# Altium PCB PCB3.PcbDoc (part 1 of 2)
Units mil, origin at the board's own origin, x right, y up, seen from the top; angles counter-clockwise.
Board outline 4805.03 x 4420.03 mil, 2 copper layers (Top Layer, Bottom Layer); 108 components, 108 nets, 556 pads, 252 vias.
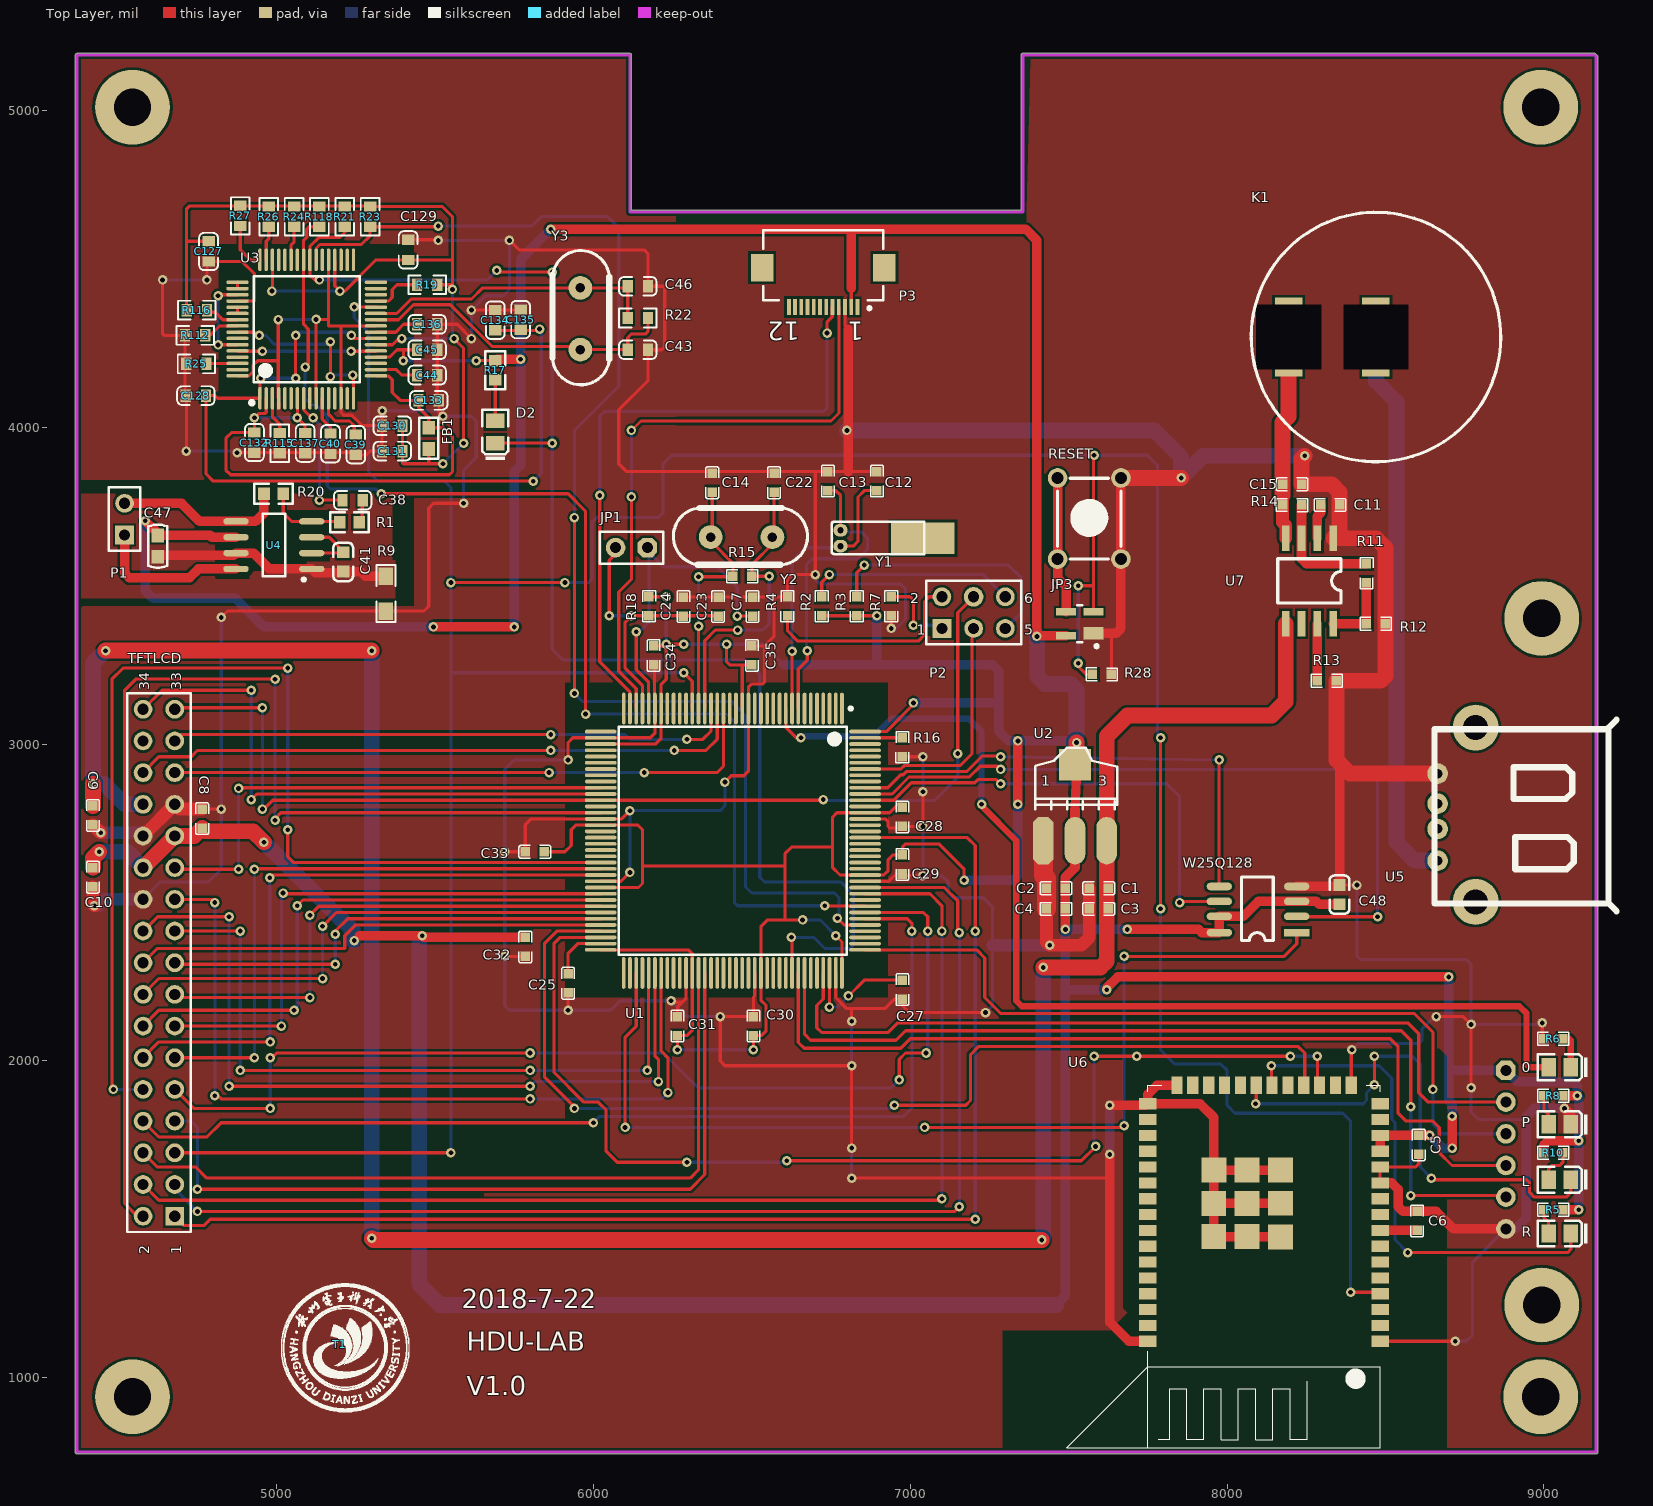
[diagram p0: Top Layer view]
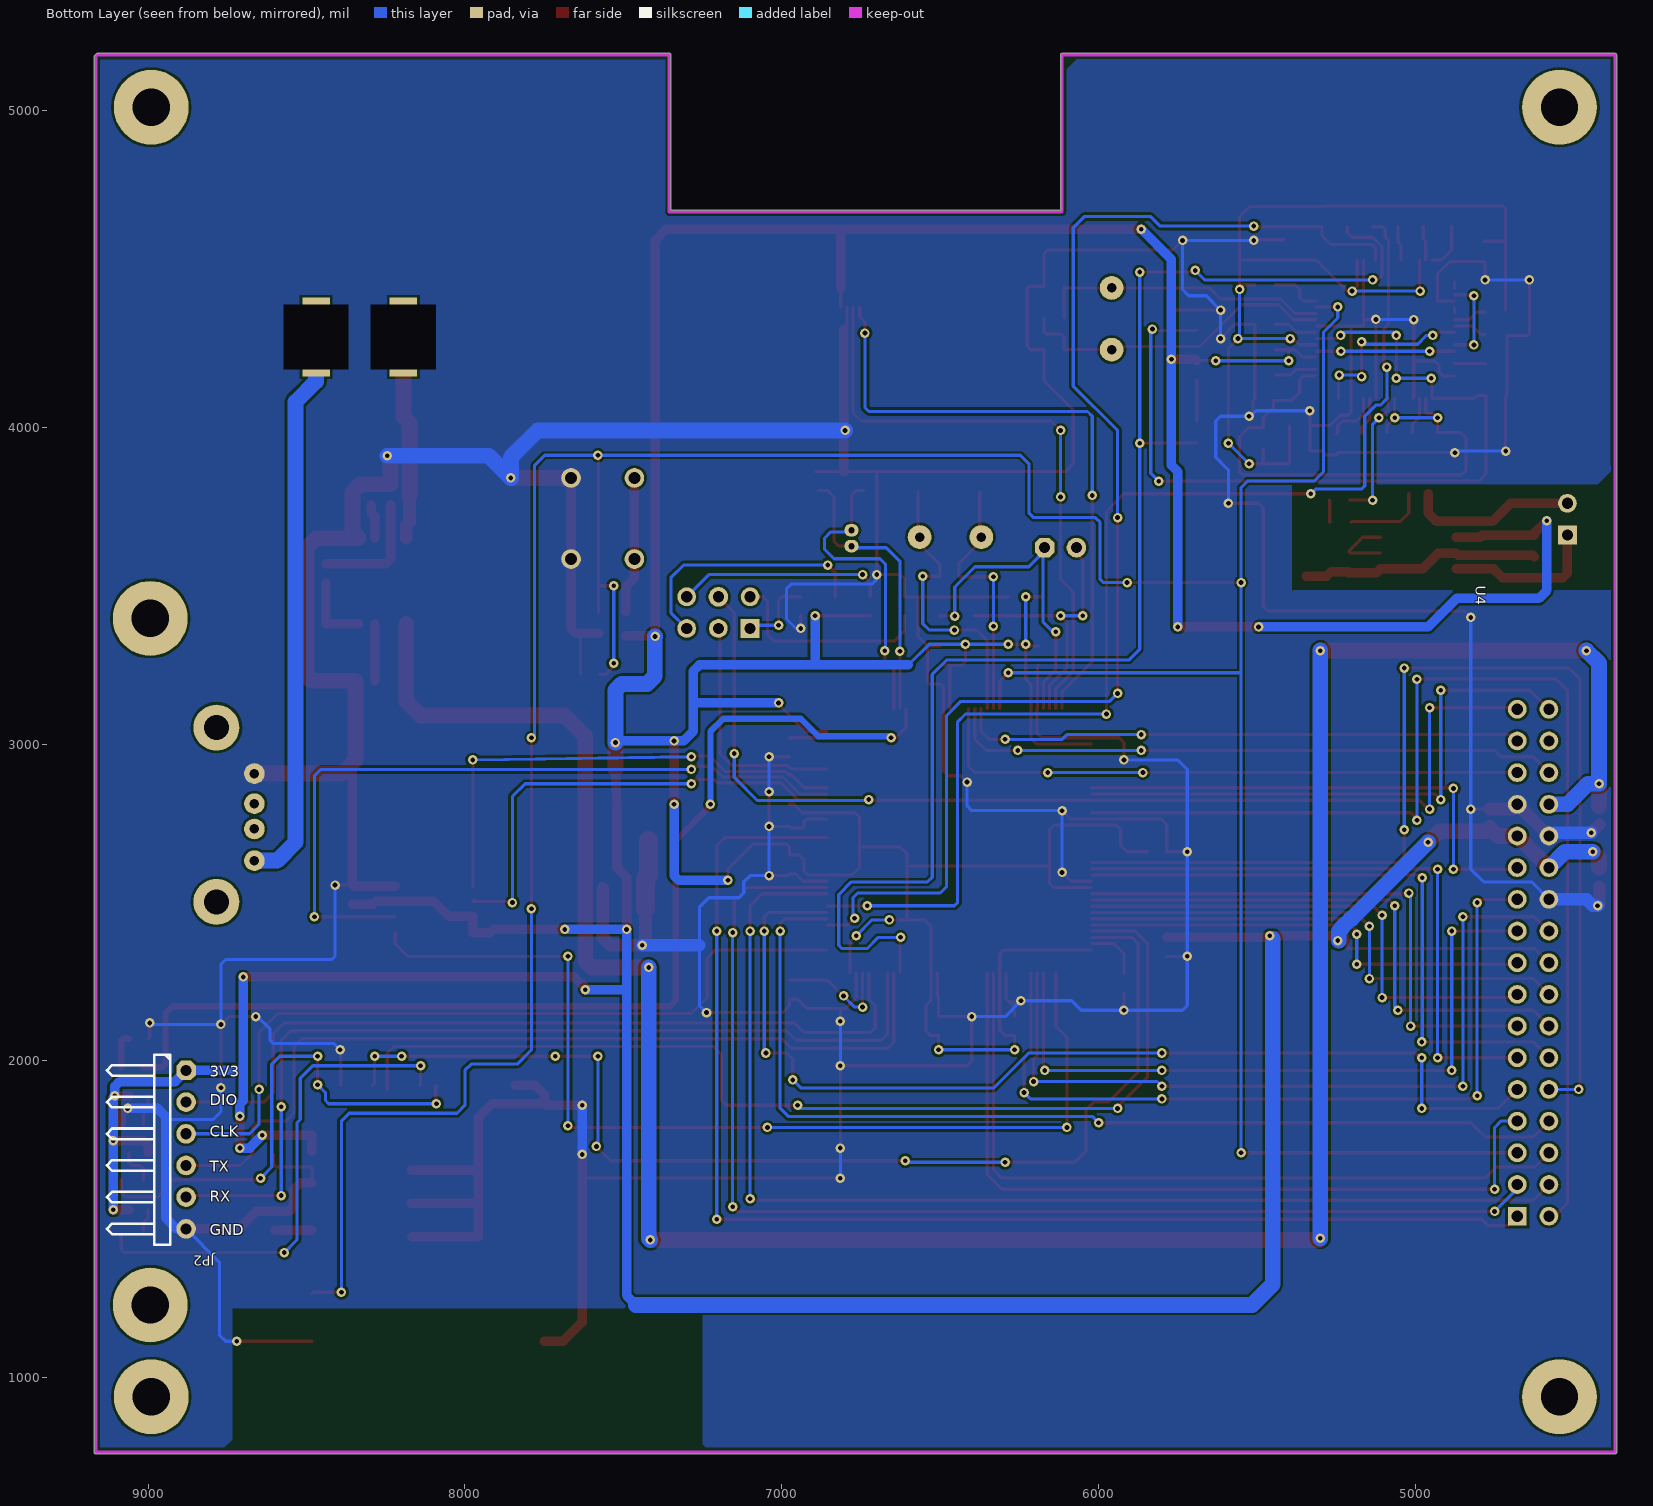
[diagram p1: Bottom Layer view, seen from below]
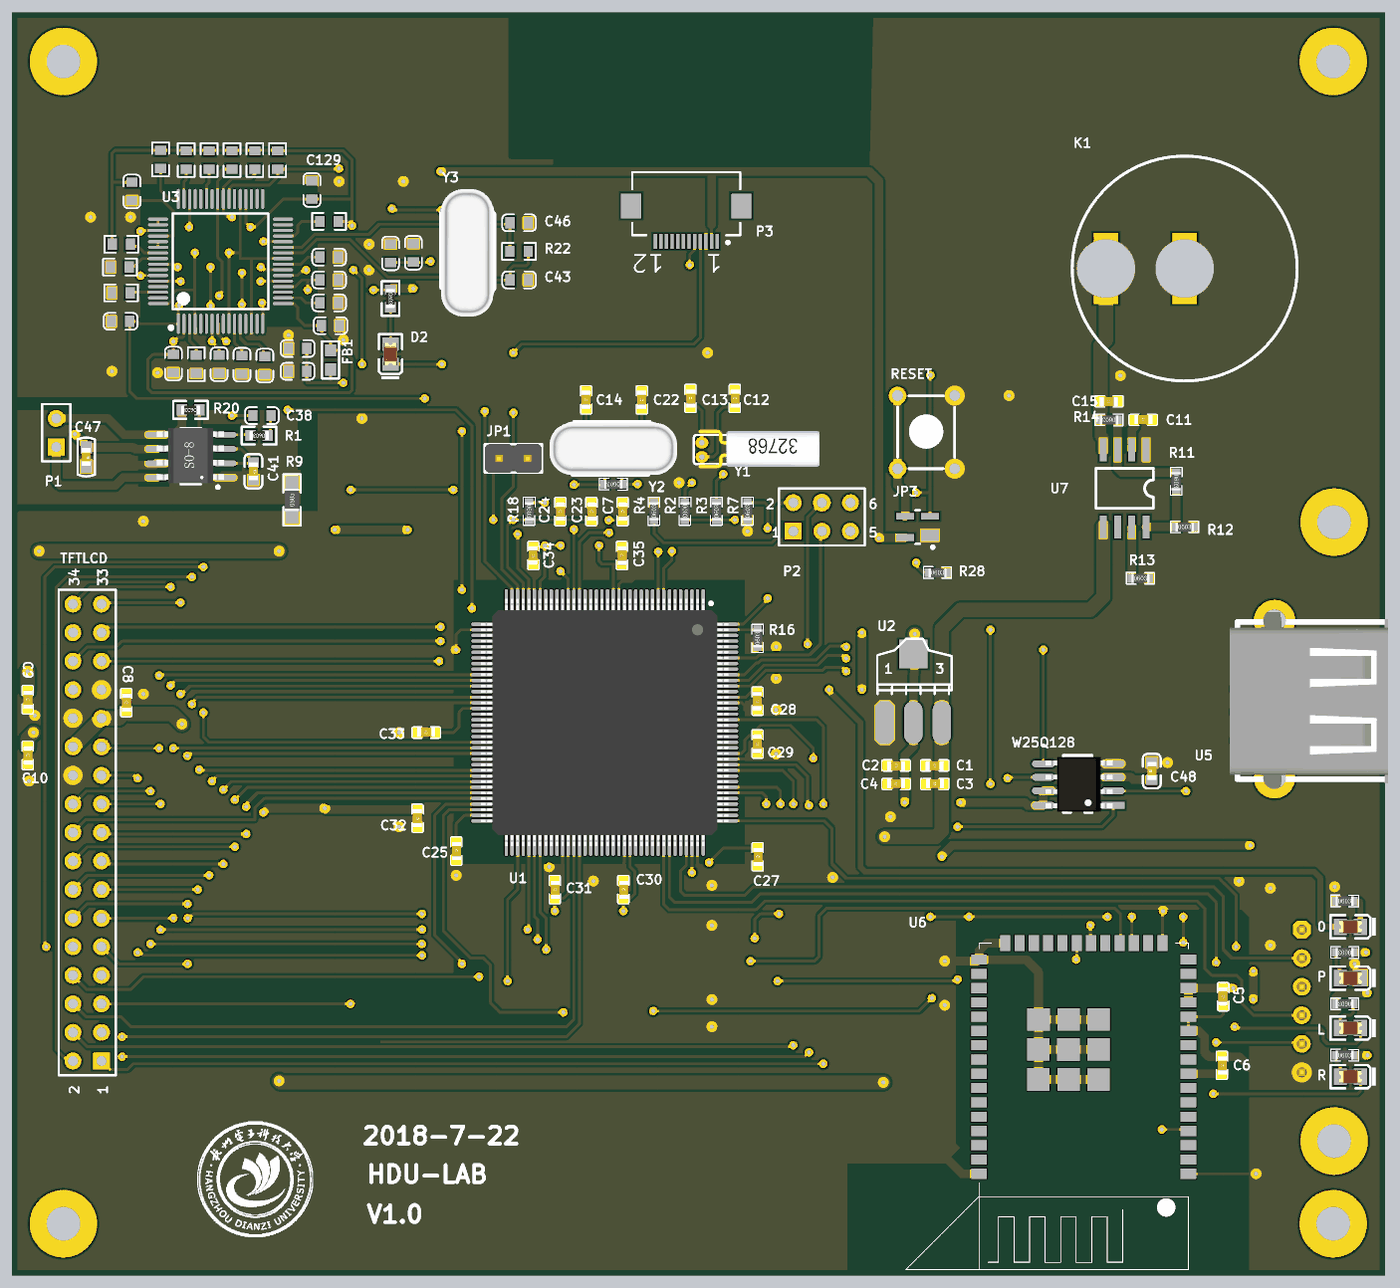
[diagram p3: 3D render of the assembled board from above, using the file's embedded part models]

## Layer stack, top to bottom
Top Solder: solder mask 0.4, Solder Resist, Dk 3.5
Top Layer: signal copper 1.4
Dielectric 1: dielectric 12.6, FR-4, Dk 4.8
Bottom Layer: signal copper 1.4
Bottom Solder: solder mask 0.4, Solder Resist, Dk 3.5

## Board outline
4364.99,765 ccw(c4370,765) 4370,759.99 9165,759.99 ccw(c9165,765) 9170.01,765 9170.01,5170 ccw(c9165,5170) 9168.53,5173.56 9168.54,5173.55 9163.55,5178.55 9163.56,5178.53 ccw(c9160,5175) 9160,5180.02 7355,5180.02 ccw(c7355,5175) 7349.98,5175 7349.98,4685.02 6120.02,4685.02 6120.02,5175 ccw(c6115,5175) 6115,5180.02 4370,5180.02 ccw(c4370,5175) 4364.98,5175

## Design rules (kind name [scope] priority, off if disabled: settings)
Clearance [All] p1: gap=8 ignorepadtopadclearanceinfootprint=TRUE
PlaneConnect [All] p1: planeconnectstyle=Direct reliefexpansion=20 reliefentries=4 reliefconductorwidth=10 reliefairgap=10
PolygonConnect [All] p1: connectstyle=Direct reliefconductorwidth=10 reliefentries=4 polygonreliefangle="90 Angle" airgapwidth=10
RoutingVias [All] p1: holewidth=15 width=30 viastyle="Through Hole" minholewidth=15 minwidth=30 maxholewidth=15 maxwidth=30
SolderMaskExpansion [All] p1: expansion=4
Width Width_7 [InNet('GND')] p1: maxlimit=120 minlimit=10 preferedwidth=60
Width Width_6 [InNet('BAT')] p2: maxlimit=50 minlimit=10 preferedwidth=30
Width Width_5 [InNet('24V_IN')] p3: maxlimit=120 minlimit=50 preferedwidth=100
Width Width_4 [InNet('5V_IN')] p4: maxlimit=80 minlimit=10 preferedwidth=60
Width Width_3 [InNet('3V3')] p5: maxlimit=60 minlimit=10 preferedwidth=40
Width Width_2 [InNet('+5V')] p6: maxlimit=80 minlimit=10 preferedwidth=60
Width Width_1 [InNet('+24V')] p7: maxlimit=120 minlimit=50 preferedwidth=100
Width [All] p8: maxlimit=100 minlimit=10 preferedwidth=10
29 further rules are at their usual default settings.

## Classes and differential pairs
component class 实验平台2: 0 C1 C2 C3 C4 C5 C6 C7 C8 C9 C10 C11 C12 C13 C14 C15 C22 C23 C24 C25 C27 C28 C29 C30 C31 C32 C33 C34 C35 C38 C41 C43 C46 C47 C48 C129 D2 FB1 JP1 JP2 JP3 K1 L P P1 P2 P3 R R1 R2 R3 R4 R7 R9 R11 R12 R13 R14 R15 R16 R18 R20 R22 R28 RESET TFTLCD U1 U2 U3 U4 U5 U6 U7 W25Q128 Y1 Y2 Y3 ""

## Components (designator, comment, footprint, x,y, rotation, side; value= is the part's Value field where it differs from the comment)
0 "白灯 0805" 0805_LED_S1 9050,1980 r180 top (schematic designator D4)
C1 "10uF" 0603_C#1 7595,2545 r180 top
C2 "10uF" 0603_C#1 7460,2545 r180 top
C3 "104" 0603_C#1 7595,2480 r0 top
C4 "104" 0603_C#1 7460,2480 r0 top
C5 "104" 0603_C#1 8605,1735 r90 top
C6 "100nF" 0603_C#1 8600,1495 r270 top value=104
C7 "2.2u" 0603_C#1 6502.43,3434 r270 top value=104
C8 "104" 0603_C#1 4765,2765 r270 top
C9 "104" 0603_C#1 4420,2775 r270 top
C10 "104" 0603_C#1 4420,2580 r270 top
C11 "1nF" 0603_C#1 8325,3755 r0 top value=104
C12 "22p" 0603_C#1 6895,3830 r270 top
C13 "22p" 0603_C#1 6740,3830 r270 top
C14 "22p" 0603_C#1 6375,3825 r90 top
C15 "100nF" 0603_C#1 8205,3820 r180 top value=104
C22 "22p" 0603_C#1 6570,3825 r90 top
C23 "10u" 0603_C#1 6393.28,3434 r270 top
C24 "104" 0603_C#1 6284.14,3434 r270 top
C25 "2.2uf" 0603_C#1 5920,2245 r270 top
C27 "2.2uf" 0603_C#1 6975,2225 r270 top
C28 "104" 0603_C#1 6975,2770 r90 top
C29 "104" 0603_C#1 6975,2620 r90 top
C30 "104" 0603_C#1 6505,2110 r270 top
C31 "104" 0603_C#1 6265,2110 r270 top
C32 "104" 0603_C#1 5785,2360 r90 top
C33 "104" 0603_C#1 5815,2660 r0 top
C34 "104" 0603_C#1 6190,3280 r90 top
C35 "104" 0603_C#1 6500,3280 r270 top
C38 "1uF" C0603(1608) 5240,3770 r180 top
C39 "10uF" C0603(1608) 5250,3945 r270 top
C40 "10uF" C0603(1608) 5170,3948 r270 top
C41 "1uF (105) 10% 50V" 0603_C#2 5210,3575 r270 top
C43 "27pF" C0603(1608) 6140.06,4245 r180 top
C44 "0.1uF" C0603(1608) 5475,4165 r0 top
C45 "0.1uF" C0603(1608) 5475,4245 r0 top
C46 "27pF" C0603(1608) 6140.06,4445 r180 top
C47 "100nF" C-0603 4625,3625 r270 top
C48 "0.1uF" 0603_C#2 8355,2525 r90 top
C127 "0.1uF" C0603(1608) 4785,4555 r90 top
C128 "0.1uF" C0603(1608) 4745,4100 r0 top
C129 "0.1uF" C0603(1608) 5415,4560 r270 top
C130 "10uF" C0603(1608) 5365,4005 r180 top
C131 "0.1uF" C0603(1608) 5365,3925 r0 top
C132 "10uF" C0603(1608) 4930,3952 r270 top
C133 "0.1uF" C0603(1608) 5480,4085 r180 top
C134 "10uF" C0603(1608) 5690,4338 r90 top
C135 "0.1uF" C0603(1608) 5770,4340 r270 top
C136 "1uF" C0603(1608) 5475,4325 r0 top
C137 "0.1uF" C0603(1608) 5090,3950 r90 top
D2 "红灯 0805" 0805_LED_S1 5690,3985 r90 top
FB1 "100M/600R" B0603 5480,3965 r270 top
JP1 "header" header2 6170,3620 r180 top
JP2 "header" header6HA 8880,1970 r270 bottom
JP3 "复位芯片" SOT-143_M 7535,3380 r180 top
K1 "开关" kaiguan 8458.66,4279.77 r180 top
L "翠绿 0805" 0805_LED_S1 9050,1625 r180 top (schematic designator D3)
P "红灯 0805" 0805_LED_S1 9050,1800 r180 top (schematic designator D5)
P1 "扬声器" HDR1X2 4520,3660 r90 top
P2 "Header 3X2" HDR2X3 7100,3365 r0 top
P3 "二维码" FH12A-12S-0.5sH 6525.31,3955 r180 top
R "蓝灯 0805" 0805_LED_S1 9050,1455 r180 top (schematic designator D1)
R1 "2KΩ (2001) ±1%" 0603_R#1 5230,3700 r180 top
R2 "10K" 0603_R#2 6720.71,3434.99 r270 top value=1K
R3 "10K" 0603_R#2 6830.86,3435 r90 top value=1K
R4 "10K" 0603_R#2 6612.57,3435 r90 top value=1K
R5 "1K" 0603_R#2 9030.01,1530 r0 top
R6 "1K" 0603_R#2 9030.01,2070 r0 top
R7 "10K" 0603_R#2 6940,3435 r90 top value=1K
R8 "1K" 0603_R#2 9030,1890 r180 top
R9 "Res2" 0805_r 5345,3475 r90 top value=0R
R10 "1K" 0603_R#2 9030,1710 r180 top
R11 "22K" 0603_R#2 8440,3540 r270 top value=1K
R12 "100K" 0603_R#2 8470,3380 r0 top value=1K
R13 "76K" 0603_R#2 8315,3200 r0 top value=1K
R14 "271K" 0603_R#2 8205,3755 r180 top value=1K
R15 "1M/0805" 0603_R#2 6470,3530 r180 top
R16 "0" 0603_R#2 6975,2990 r90 top value=1K
R17 "1KΩ (1001) ±1%" 0603_R#1 5690,4180 r270 top
R18 "10" 0603_R#2 6175,3434.99 r270 top value=1K
R19 "10K" R0603 5475,4450 r0 top
R20 "22KΩ (2202) ±1%" 0603_R#1 4990.32,3790 r180 top
R21 "10K" R0603 5215,4665 r270 top
R22 "4.7M" R0603 6140,4345 r180 top
R23 "10K" R0603 5295,4665 r270 top
R24 "10K" R0603 5055,4665 r270 top
R25 "10K" R0603 4747,4200 r0 top
R26 "10K" R0603 4975,4665 r270 top
R27 "10K" R0603 4885,4667 r270 top
R28 "100K" 0603_R#2 7605,3220 r0 top value=1K
R112 "10K" R0603 4743,4290 r0 top
R115 "10K" R0603 5010,3950 r90 top
R116 "10K" R0603 4748,4370 r180 top
R118 "10K" R0603 5135,4665 r270 top
RESET "KEY_M" KEY_M 7465,3584.09 r90 top
T1 "HDU" HDU 5200,1105 r0 top
TFTLCD "TFT_LCD" HDR2X17 4678.35,1510 r90 top
U1 "STM32F407Z" LQFP144 6440,2695 r270 top
U2 "AMS1117-3.3" AMS1117 7419.97,2695.06 r0 top
U3 "XFS5152CE" LQFP-64_10x10x05P 5095,4310 r0 top
U4 "HXJ8002" SOIC-8#1 4995,3630 r90 top
U5 "USB-AM" USB_AM 8950,2780 r0 top
U6 "USR-C322" USR-C322-PCB 8483.07,1922.87 r180 top
U7 "tps25921a过压保护" SOIC-8#2 8335,3650 r270 top
W25Q128 "W25Q128" SO-8N 8095,2480 r180 top
Y1 "32.768K" XTAL_32 6780,3625 r0 top
Y2 "8MHz" XTAL_2 6480,3655 r180 top
Y3 "12M" XTAL_2 5960,4330 r90 top

## Footprints (in the part's own frame and the unit in brackets; to place one, negate y for a bottom-side part, rotate by r counter-clockwise, add the part's x,y. Pads: shape width x height; smd on the part's side, far side on the other; paste and mask are expansions set on the pad)
0603_C#1 [mil] "Capacitor"
  rect 30x30 smd: 1(-30,0) 2(30,0)
  silkscreen extent -50,-20 50,20, body extent -51,-18 52,21, height 35
0603_C#2 [mil]
  rect 36.61x38.58 smd: 1(-30.32,0) 2(30.32,0)
  silkscreen extent -60,-31 60,31, body extent -31,-16 32,16, height 12
0603_R#1 [mm]
  rect 0.93x0.98 smd: 1(-0.77,0) 2(0.77,0)
  silkscreen extent -1.53,-0.79 1.54,0.79, body extent -0.85,-0.4 0.85,0.4, height 0.56
0603_R#2 [mm]
  rect 0.762x0.762 smd: 1(-0.762,0) 2(0.762,0)
  silkscreen extent -1.24,-0.51 1.24,0.53, body extent -0.8,-0.4 0.8,0.4, height 0.45
0805_LED_S1 [mm]
  rect 1.16x1.47 smd: A(0.89,0) K(-0.89,0)
  silkscreen extent -2.25,-1.04 1.77,1.03, body extent -1.01,-0.62 1.01,0.62, height 1.1
0805_r [mil]
  rect 55.12x46 smd: 1(-55,0) 2(55,0)
  silkscreen extent -90,-30 90,30, body extent -39,-25 39,25, height 22
AMS1117 [mil]
  oct 65x150 smd: 1(0.03,-0.06)
  oval 65x150 smd: 2(100.03,-0.06) 3(200.03,-0.06)
  rect 100x100 smd: 4(100.03,239.94)
  silkscreen extent -26,100 234,293
B0603 [mm]
  rect 1.1x1 smd: 1(-0.85,0) 2(0.85,0)
  silkscreen extent -1.65,-0.76 1.65,0.76
C0603(1608) [mm]
  rect 0.82x1 smd: 1(-0.813,0) 2(0.813,0)
  silkscreen extent -1.5,-0.75 1.5,0.75
C-0603 [mm] "贴片电容"
  rect 1.1x1 smd: 1(-0.85,0) 2(0.85,0)
  silkscreen extent -1.73,-0.76 1.73,0.76, body extent -0.8,-0.4 0.8,0.4, height 0.3
FH12A-12S-0.5sH [mm]
  rect 0.3x1.3 smd: 1(-7.826,-10.795) 2(-7.326,-10.795) 3(-6.826,-10.795) 4(-6.326,-10.795) 5(-5.826,-10.795) 6(-5.326,-10.795) 7(-4.826,-10.795) 8(-4.326,-10.795) 9(-3.826,-10.795) 10(-3.326,-10.795) 11(-2.826,-10.795) 12(-2.326,-10.795)
  rect 1.8x2.2 smd: 14(-9.98,-13.944) 15(-0.18,-13.944)
  silkscreen extent -9.88,-16.94 -0.28,-10.57
HDR1X2 [mm] "Connector; Header; 2 Position"
  rect 1.5x1.5 hole 0.9: 1(0,0)
  round 1.5 hole 0.9: 2(2.54,0)
  silkscreen extent -1.27,-1.27 3.81,1.27
HDR2X3 [mm] "Connector; Header; 3x2 Position"
  rect 1.5x1.5 hole 0.9: 1(0,0)
  round 1.5 hole 0.9: 2(0,2.54) 3(2.54,0) 5(5.08,0) 6(5.08,2.54)
  round 1.575 hole 0.889: 4(2.54,2.54)
  silkscreen extent -1.27,-1.27 6.35,3.81
HDR2X17 [mm] "Connector; Header; 17x2 Position"
  rect 1.5x1.5 hole 0.9: 1(0,0)
  round 1.5 hole 0.9: 2(0,2.54) 3(2.54,0) 4(2.54,2.54) 5(5.08,0) 6(5.08,2.54) 7(7.62,0) 8(7.62,2.54) 9(10.16,0) 10(10.16,2.54) 11(12.7,0) 12(12.7,2.54) 13(15.24,0) 14(15.24,2.54) 15(17.78,0) 16(17.78,2.54) 17(20.32,0) 18(20.32,2.54) 19(22.86,0) 20(22.86,2.54) 21(25.4,0) 22(25.4,2.54) 23(27.94,0) 24(27.94,2.54) 25(30.48,0) 26(30.48,2.54) 27(33.02,0) 28(33.02,2.54) 29(35.56,0) 30(35.56,2.54) 31(38.1,0) 32(38.1,2.54) 33(40.64,0) 34(40.64,2.54)
  silkscreen extent -1.27,-1.27 41.91,3.81
HDU [mil]
  silkscreen extent -186,-212 219,193
header2 [mil]
  oct 62x62 hole 35: 1(0,0)
  round 62 hole 35: 2(100,0)
  silkscreen extent -50,-50 150,50, body extent -50,-50 150,50, height 398
header6HA [mil]
  oct 62x62 hole 35: 1(0,0)
  round 62 hole 35: 2(100,0) 3(200,0) 4(300,0) 5(400,0) 6(500,0)
  silkscreen extent -50,-250 550,-50, body extent -50,-276 550,50, height 170
kaiguan [mm]
  rect 2.2x6.3 hole 5.2 square: 1(-0.288,-0.133) 2(6.712,-0.133)
  silkscreen extent -10.29,-10.13 9.71,9.86
KEY_M [mil]
  round 62 hole 38: 1(0,0) 1(255.91,0) 2(0,-200) 2(255.91,-200)
  silkscreen extent 0,-200 255,0
LQFP144 [mm]
  oval 2.54x0.3 smd: 1(-10.6,8.75) 2(-10.6,8.25) 3(-10.6,7.75) 4(-10.6,7.25) 5(-10.6,6.75) 6(-10.6,6.25) 7(-10.6,5.75) 8(-10.6,5.25) 9(-10.6,4.75) 10(-10.6,4.25) 11(-10.6,3.75) 12(-10.6,3.25) 13(-10.6,2.75) 14(-10.6,2.25) 15(-10.6,1.75) 16(-10.6,1.25) 17(-10.6,0.75) 18(-10.6,0.25) 19(-10.6,-0.25) 20(-10.6,-0.75) 21(-10.6,-1.25) 22(-10.6,-1.75) 23(-10.6,-2.25) 24(-10.6,-2.75) 25(-10.6,-3.25) 26(-10.6,-3.75) 27(-10.6,-4.25) 28(-10.6,-4.75) 29(-10.6,-5.25) 30(-10.6,-5.75) 31(-10.6,-6.25) 32(-10.6,-6.75) 33(-10.6,-7.25) 34(-10.6,-7.75) 35(-10.6,-8.25) 36(-10.6,-8.75) 73(10.6,-8.75) 74(10.6,-8.25) 75(10.6,-7.75) 76(10.6,-7.25) 77(10.6,-6.75) 78(10.6,-6.25) 79(10.6,-5.75) 80(10.6,-5.25) 81(10.6,-4.75) 82(10.6,-4.25) 83(10.6,-3.75) 84(10.6,-3.25) 85(10.6,-2.75) 86(10.6,-2.25) 87(10.6,-1.75) 88(10.6,-1.25) 89(10.6,-0.75) 90(10.6,-0.25) 91(10.6,0.25) 92(10.6,0.75) 93(10.6,1.25) 94(10.6,1.75) 95(10.6,2.25) 96(10.6,2.75) 97(10.6,3.25) 98(10.6,3.75) 99(10.6,4.25) 100(10.6,4.75) 101(10.6,5.25) 102(10.6,5.75) 103(10.6,6.25) 104(10.6,6.75) 105(10.6,7.25) 106(10.6,7.75) 107(10.6,8.25) 108(10.6,8.75)
  oval 0.3x2.54 smd: 37(-8.75,-10.6) 38(-8.25,-10.6) 39(-7.75,-10.6) 40(-7.25,-10.6) 41(-6.75,-10.6) 42(-6.25,-10.6) 43(-5.75,-10.6) 44(-5.25,-10.6) 45(-4.75,-10.6) 46(-4.25,-10.6) 47(-3.75,-10.6) 48(-3.25,-10.6) 49(-2.75,-10.6) 50(-2.25,-10.6) 51(-1.75,-10.6) 52(-1.25,-10.6) 53(-0.75,-10.6) 54(-0.25,-10.6) 55(0.25,-10.6) 56(0.75,-10.6) 57(1.25,-10.6) 58(1.75,-10.6) 59(2.25,-10.6) 60(2.75,-10.6) 61(3.25,-10.6) 62(3.75,-10.6) 63(4.25,-10.6) 64(4.75,-10.6) 65(5.25,-10.6) 66(5.75,-10.6) 67(6.25,-10.6) 68(6.75,-10.6) 69(7.25,-10.6) 70(7.75,-10.6) 71(8.25,-10.6) 72(8.75,-10.6) 109(8.75,10.6) 110(8.25,10.6) 111(7.75,10.6) 112(7.25,10.6) 113(6.75,10.6) 114(6.25,10.6) 115(5.75,10.6) 116(5.25,10.6) 117(4.75,10.6) 118(4.25,10.6) 119(3.75,10.6) 120(3.25,10.6) 121(2.75,10.6) 122(2.25,10.6) 123(1.75,10.6) 124(1.25,10.6) 125(0.75,10.6) 126(0.25,10.6) 127(-0.25,10.6) 128(-0.75,10.6) 129(-1.25,10.6) 130(-1.75,10.6) 131(-2.25,10.6) 132(-2.75,10.6) 133(-3.25,10.6) 134(-3.75,10.6) 135(-4.25,10.6) 136(-4.75,10.6) 137(-5.25,10.6) 138(-5.75,10.6) 139(-6.25,10.6) 140(-6.75,10.6) 141(-7.25,10.6) 142(-7.75,10.6) 143(-8.25,10.6) 144(-8.75,10.6)
  silkscreen extent -10.72,-9.15 9.15,9.57, body extent -11,-11 11,11, height 1.6
LQFP-64_10x10x05P [mm]
  oval 0.28x1.8 smd mask+0.051: 1(-3.75,-5.55) 2(-3.25,-5.55) 3(-2.75,-5.55) 4(-2.25,-5.55) 5(-1.75,-5.55) 6(-1.25,-5.55) 7(-0.75,-5.55) 8(-0.25,-5.55) 9(0.25,-5.55) 10(0.75,-5.55) 11(1.25,-5.55) 12(1.75,-5.55) 13(2.25,-5.55) 14(2.75,-5.55) 15(3.25,-5.55) 16(3.75,-5.55) 33(3.75,5.55) 34(3.25,5.55) 35(2.75,5.55) 36(2.25,5.55) 37(1.75,5.55) 38(1.25,5.55) 39(0.75,5.55) 40(0.25,5.55) 41(-0.25,5.55) 42(-0.75,5.55) 43(-1.25,5.55) 44(-1.75,5.55) 45(-2.25,5.55) 46(-2.75,5.55) 47(-3.25,5.55) 48(-3.75,5.55)
  oval 1.8x0.28 smd mask+0.051: 17(5.55,-3.75) 18(5.55,-3.25) 19(5.55,-2.75) 20(5.55,-2.25) 21(5.55,-1.75) 22(5.55,-1.25) 23(5.55,-0.75) 24(5.55,-0.25) 25(5.55,0.25) 26(5.55,0.75) 27(5.55,1.25) 28(5.55,1.75) 29(5.55,2.25) 30(5.55,2.75) 31(5.55,3.25) 32(5.55,3.75) 49(-5.55,3.75) 50(-5.55,3.25) 51(-5.55,2.75) 52(-5.55,2.25) 53(-5.55,1.75) 54(-5.55,1.25) 55(-5.55,0.75) 56(-5.55,0.25) 57(-5.55,-0.25) 58(-5.55,-0.75) 59(-5.55,-1.25) 60(-5.55,-1.75) 61(-5.55,-2.25) 62(-5.55,-2.75) 63(-5.55,-3.25) 64(-5.55,-3.75)
  silkscreen extent -4.55,-6.05 4.25,4.25
R0603 [mm]
  rect 0.82x1 smd: 1(-0.813,0) 2(0.813,0)
  silkscreen extent -1.5,-0.75 1.5,0.75
SO-8N [mil]
  rect 80x24 smd: 1(-124.68,75)
  oval 80x24 smd: 2(-124.68,23.82) 3(-124.68,-23.43) 4(-124.68,-70.67) 5(119.41,-70.67) 6(119.41,-23.43) 7(119.41,23.82) 8(119.41,75)
  silkscreen extent -51,-100 49,100, body extent -123,-95 113,98, height 63
SOIC-8#1 [mil]
  oval 20x80 smd: 1(-77.09,-115.71) 2(-27.09,-115.71) 3(22.91,-115.71) 4(72.91,-115.71) 5(72.91,123.27) 6(22.91,123.27) 7(-27.09,123.27) 8(-77.09,123.27)
  silkscreen extent -115,-96 96,39, body extent -96,-113 96,123, height 67
SOIC-8#2 [mil]
  rect 80x24 smd: 1(0,0) 2(0,-50.06) 3(0,-100.06) 4(0,-150.06) 5(270,-150) 6(270,-100) 7(270,-50) 8(270,0)
  silkscreen extent 65,-175 205,25
SOT-143_M [mm] "SOT143, 4-Leads, Body 2.9x1.3mm, Pitch 1.9mm, Lead Span 2.5mm, IPC Low Density"
  rect 1.6x1 smd: 1(-1.1,0.75)
  rect 1.6x0.6 smd: 2(-1.1,-0.95) 3(1.1,-0.95) 4(1.1,0.95)
  silkscreen extent -1.48,-1.5 0.2,1.92, body extent -0.7,-1.52 0.7,1.52, height 1.1
USB_AM [mil]
  round 65 hole 30: 1(-285.63,127.09) 2(-285.63,32.09) 3(-285.63,-47.91) 4(-285.63,-147.91)
  round 145 hole 78.74: GND(-165.63,-277.91) GND(-165.63,272.09)
  silkscreen extent -296,-308 279,297, body extent -323,-321 233,301, height 300
USR-C322-PCB [mm]
  rect 1.4x0.9 smd: 1(0,20.52) 2(0,19.25) 3(0,17.98) 4(0,16.71) 5(0,15.44) 6(0,14.17) 7(0,12.9) 8(0,11.63) 9(0,10.36) 10(0,9.09) 11(0,7.82) 12(0,6.55) 13(0,5.28) 14(0,4.01) 15(0,2.74) 16(0,1.47) 29(18.62,1.47) 30(18.62,2.74) 31(18.62,4.01) 32(18.62,5.28) 33(18.62,6.55) 34(18.62,7.82) 35(18.62,9.09) 36(18.62,10.36) 37(18.62,11.63) 38(18.62,12.9) 39(18.62,14.17) 40(18.62,15.44) 41(18.62,16.71) 42(18.62,17.98) 43(18.62,19.25) 44(18.62,20.52)
  rect 0.9x1.4 smd: 17(2.31,0) 18(3.58,0) 19(4.85,0) 20(6.12,0) 21(7.39,0) 22(8.66,0) 23(9.93,0) 24(11.2,0) 25(12.47,0) 26(13.74,0) 27(15.02,0) 28(16.29,0)
  rect 2x2 smd: 45(7.978,9.451) 45(7.985,6.79) 45(7.998,12.145) 45(10.659,12.132) 45(10.659,6.784) 45(10.672,9.478) 45(13.327,6.797) 45(13.34,12.132) 45(13.34,9.464)
  silkscreen extent 0,0 25.12,29.05
XTAL_2 [mil]
  round 75 hole 30: 1(-84.92,1.38) 2(110.08,1.38)
  silkscreen extent -196,-90 228,89, body extent -213,-90 233,93, height 138
XTAL_32 [mil]
  oval 45x40 hole 20: 1(0,0) 2(0,50)
  rect 200x100 smd: ""(260,25)
  silkscreen extent -28,-25 264,77, body extent -12,-40 412,96, height 126

## Part data
0: library part "0805 白灯", "发光二极管", Package=0805, SuppliersPartNumber=C34499, ComponentLink1Description=供应商链接, ComponentLink1URL=http://www.szlcsc.com/product/details_35468.html, Supplier=LC
C1 C2: library part CAP
C3 C4 C8 C9 C10: library part C_3
C5 C6 C7 C11 C15 C28 C29 C30 C31 C32 C33 C34 C35 C44 C45 C136: library part CAP, "Capacitor"
  C5 C6 C7 C11 C15 C28 C29 C30 C31 C32 C33 C34 C35: LatestRevisionDate=17-Jul-2002, LatestRevisionNote="Re-released for DXP Platform.", PackageReference=RAD-0.3, Published=8-Jun-2000, Publisher="Altium Limited"
C12 C13 C14 C22 C23 C24 C25 C27: library part C_1
C38 C43 C46 C127 C128 C129 C131 C133 C135 C137: library part "Cap NP", "电容", LatestRevisionDate=17-Jul-2002, LatestRevisionNote="Re-released for DXP Platform.", Published=8-Jun-2000, Publisher="Altium Limited"
C39 C40 C130 C132 C134: library part "CAP POL", Part package=6032
C41: library part "0603 1uF (105) 10% 50V", "贴片电容", Package=0603, SuppliersPartNumber=C15849, ComponentLink1Description=供应商链接, ComponentLink1URL=http://www.szlcsc.com/product/details_16531.html, Supplier=LC
C47: library part "0805 10uF (106) 10% 25V", "贴片电容", Package=0805, SuppliersPartNumber=C15850, ComponentLink1Description=供应商链接, ComponentLink1URL=http://www.szlcsc.com/product/details_16532.html, Supplier=LC
C48: library part Cap, "Capacitor", LatestRevisionDate=17-Jul-2002, LatestRevisionNote="Re-released for DXP Platform.", PackageDescription="Radial Cap, Thru-Hole; 2 Leads; 0.3 in Pin Spacing", PackageReference=RAD-0.3, Published=8-Jun-2000, Publisher="Altium Limited"
D2 P: library part "0805 红灯", "发光二极管", Package=0805, SuppliersPartNumber=C2295, ComponentLink1Description=供应商链接, ComponentLink1URL=http://www.szlcsc.com/product/details_2668.html, Supplier=LC
FB1: library part Fbead, "磁珠", Code_IEC=1005, Code_JEITA=0402, LatestRevisionDate=17-Jul-2002, LatestRevisionNote="Re-released for DXP Platform.", PackageReference=0402-A, Published=8-Jun-2000, Publisher="Altium Limited"
JP1: library part "HEADER 2"
JP2: library part "HEADER 6"
JP3: library part "HEADER 2X2"
L: library part "0805 翠绿", "发光二极管", Package=0805, SuppliersPartNumber=C2297, ComponentLink1Description=供应商链接, ComponentLink1URL=http://www.szlcsc.com/product/details_2670.html, Supplier=LC
P1: library part "Header 2", "Header, 2-Pin", LatestRevisionDate=17-Jul-2002, LatestRevisionNote="Re-released for DXP Platform.", Publisher="Altium Limited"
P2: "Header, 3-Pin, Dual row", LatestRevisionDate=17-Jul-2002, LatestRevisionNote="Re-released for DXP Platform.", Publisher="Altium Limited"
P3: library part "Header 12", "Header, 12-Pin", LatestRevisionDate=17-Jul-2002, LatestRevisionNote="Re-released for DXP Platform.", Publisher="Altium Limited"
R: library part "0805 蓝灯", "发光二极管", Package=0805, SuppliersPartNumber=C2293, ComponentLink1Description=供应商链接, ComponentLink1URL=http://www.szlcsc.com/product/details_2666.html, Supplier=LC
R1: library part "0603 2KΩ (2001) 1%", "贴片电阻", Package=0603, SuppliersPartNumber=C22975, ComponentLink1Description=供应商链接, ComponentLink1URL=http://www.szlcsc.com/product/details_23702.html, Supplier=LC
R2 R3 R4 R5 R6 R7 R8 R10 R11 R12 R13 R14 R16 R18 R28: library part RES, "Resistor", Published=8-Jun-2000, Publisher="Altium Limited", Revision="July-2002: Re-released for DXP Platform."
R9: "Resistor", LatestRevisionDate=17-Jul-2002, LatestRevisionNote="Re-released for DXP Platform.", PackageDescription="Axial Device, Thru-Hole; 2 Leads; 0.4 in Pin Spacing", PackageReference=AXIAL-0.4, Published=8-Jun-2000, Publisher="Altium Limited"
R15 R19 R21 R23 R24 R25 R26 R27 R115 R118: library part Res2, "Resistor", LatestRevisionDate=17-Jul-2002, LatestRevisionNote="Re-released for DXP Platform.", Published=8-Jun-2000, Publisher="Altium Limited"
  R115: PackageReference=AXIAL-0.4
R17: library part "0805 1KΩ (1001) 1%", "贴片电阻", Package=0805, SuppliersPartNumber=C17513, ComponentLink1Description=供应商链接, ComponentLink1URL=http://www.szlcsc.com/product/details_18201.html, Supplier=LC
R20: library part "0805 22KΩ (2202) 1%", "贴片电阻", Package=0805, SuppliersPartNumber=C17560, ComponentLink1Description=供应商链接, ComponentLink1URL=http://www.szlcsc.com/product/details_18248.html, Supplier=LC
R22 R112 R116: library part RES2, "电阻"
U1: "STM32单片机144引脚"
U2: library part AMS1117
U3: library part XFS5152-2
U4: library part LM358
U5: "Data line"
U7: library part W25X16, "W25X16;SST25VF016;MX25L1605"
Y1: library part XTAL_1, "Crystal Oscillator", LatestRevisionDate=17-Jul-2002, LatestRevisionNote="Re-released for DXP Platform.", Published=8-Jun-2000, Publisher="Altium Limited"
Y2: library part XTAL, "Crystal Oscillator", LatestRevisionDate=17-Jul-2002, LatestRevisionNote="Re-released for DXP Platform.", Published=8-Jun-2000, Publisher="Altium Limited"
Y3: library part XTAL1, "晶振"

## Free pads (board coordinates)
  round 236.22 hole 118.11: 0(4545,940) 0(4545,5010) 0(8990,940) 0(8990,5010) 0(8993.15,1229.48) 0(8993.15,3396.81)

## Via types
v1: diameter 30, hole 15, Top Layer to Bottom Layer, 252 vias

## Nets (pads, with @x,y where several pads share a name; then routed paths per layer and width w, separated by ;. In a path a pad name is that pad's centre, name@x,y a point inside that pad or via, vN(x,y) a via of type N, cw(c..) or ccw(c..) an arc to the next point about the centre after c; other vN are vias at no path point)
3V3: C2.1 C4.2 C5.2 C8.2 C10.1 C28.2 C29.2 C30.2 C31.2 C32.2 C33.2 C34.2 C35.2 C45.1 C47.1 C48.1 JP2.1 JP3.4 P3.2 R2.2 R3.1 R5.2 R8.1 R10.2 R17.1 R18.1 TFTLCD.24 TFTLCD.25 U1.17 U1.30 U1.39 U1.52 U1.62 U1.72 U1.84 U1.95 U1.108 U1.121 U1.131 U1.144 U2.2 U2.4 U3.20 U4.6 U6.13 U6.14 W25Q128.3 W25Q128.7 W25Q128.8 | length 25932.4
  Top Layer w10: v1(5245,2380) 5260,2395 ; U3.20@5313.5,4221.42 5356.42,4221.42 5380,4245 5400,4245 ; v1(5400,4210) 5400,4245 ; C45.1@5443,4245 5400,4245 ; v1(5460,2395) v1@5465,2390 ; v1(5630,4210) 5630.31,4210.31 R17.1@5690,4210.31 ; C33.2@5845,2660 5910,2660 5930,2680 5930,2730 5944.21,2744.21 U1.52@6022.68,2744.21 6140.79,2744.21 6155,2730 6155,2615 ; U1.72@6022.68,2350.51 6299.49,2350.51 6312.05,2337.95 U1.84@6312.05,2277.68 6312.05,2097.05 6295,2080 C31.2@6265,2080 v1(6265,2035) ; U1.62@6022.68,2547.36 6142.36,2547.36 6155,2560 6155,2615 ; U1.39@6022.68,3000.12 6195.12,3000.12 6213.62,3018.62 U1.30@6213.62,3112.32 6213.62,3188.62 6230,3205 v1(6230,3315) ; R18.1@6175,3464.99 v1(6230,3465) ; C34.2@6190,3310 6225,3310 v1(6230,3315) ; v1(6285,3315) v1(6230,3315) ; v1(6420,3315) 6420,3260 6430,3250 6470,3250 ; U1.17@6469.53,3112.32 6469.53,3249.53 6470,3250 ; C35.2@6500,3250 6470,3250 ; v1(6505,2035) C30.2@6505,2080 6530,2080 6545,2095 6545,2175 6528.58,2191.42 U1.95@6528.58,2277.68 6528.58,2423.58 6550,2445 6605,2445 ; v1(6660,2445) 6605,2445 ; R2.2@6720.71,3404.99 R3.1@6830.86,3405 v1(6895,3405) ; v1(6765,2395) 6784.49,2375.51 U1.108@6784.49,2277.68 ; P3.2@6813.74,4380 6813.74,4438.74 ; U1.144@6857.32,3039.49 6924.49,3039.49 7015,3130 v1(7010,3130) ; C28.2@6975,2810 6961.42,2810 6935,2783.58 U1.131@6857.32,2783.58 6768.58,2783.58 6755,2770 6755,2675 ; v1(7170,2570) 7170,2605 7090,2685 6985,2685 6975,2675 C29.2@6975,2650 6945,2650 6930,2635 6930,2600 6916.73,2586.73 U1.121@6857.32,2586.73 6778.27,2586.73 6755,2610 6755,2675 ; C48.1@8346.26,2503.43 C48.1@8355,2494.68 ; 6155,2615 6600,2615 6605,2620 ; 6605,2445 6605,2620 ; 6605,2620 6605,2655 6625,2675 6755,2675
  Top Layer w30: v1(4585,3705) 4625,3665 C47.1@4625,3658.46 4790,3658.46 4795.55,3652.91 U4.6@4871.73,3652.91 ; 5260,2395 v1(5460,2395) ; v1@5465,2390 C32.2@5785,2390 ; v1(5495,3370) v1(5750,3370) ; R17.1@5690,4210.31 5694.69,4215 v1(5770,4215) ; v1(5865,4625) 6810,4625 ; 6813.74,4438.74 6813.74,4621.26 6810,4625 ; v1(7340,2810) v1(7340,3010) ; v1(7490,2415) C4.2@7490,2480 C2.1@7490,2545 7490,2580 7520,2610 U2.2@7520,2695 7520,2795 U2.4@7525,2920 ; JP3.4@7491.69,3342.6 7402.6,3342.6 v1(7400,3340) 7400,4590 7365,4625 6810,4625 ; v1(7620,2225) 7620,2230 7655,2265 v1(8700,2265) ; v1(7685,2415) 7910,2415 7920,2405 W25Q128.8@7975.59,2405 W25Q128.7@7975.59,2456.18 8051.18,2456.18 8098.43,2503.43 W25Q128.3@8219.68,2503.43 8281.58,2503.43 8290.32,2494.68 C48.1@8355,2494.68 ; U6.13@8483.07,1715 U6.14@8483.07,1765 C5.2@8605,1765 v1(8640,1765) ; v1(8710,1725) v1(8710,1825) ; R10.2@9000,1710 9000,1735 9013.06,1748.06 v1(9110,1748.06) ; R5.2@9060.01,1530 v1(9110,1530) ; R8.1@9060,1890 v1(9105,1890)
  Top Layer w50: C10.1@4420,2610 4420,2640 v1(4440,2660) ; TFTLCD.24@4578.35,2610 TFTLCD.25@4678.35,2710 4740,2710 C8.2@4765,2735 4775,2725 4925,2725 v1(4960,2690) ; U2.4@7525,2920 v1(7525,3005)
  Bottom Layer w10: v1(5400,4210) v1(5630,4210) ; v1@5450,2385 v1(5460,2395) ; v1(6230,3315) v1(6230,3465) ; v1(6265,2035) v1(6505,2035) ; v1(6285,3315) v1(6420,3315) 6535,3315 6600,3250 ; v1(6660,2445) 6715,2445 v1(6765,2395)
  Bottom Layer w30: v1(4585,3705) 4585,3485 4610,3460 4870,3460 4960,3370 v1(5495,3370) ; v1(5750,3370) 5750,3860 5770,3880 v1(5770,4215) 5770,4530 v1(5865,4625) ; 6600,3250 7260,3250 7280,3230 7280,3135 ; 6895,3265 v1(6895,3405) ; v1(7010,3130) 7275,3130 7280,3135 ; v1(7170,2570) 7325,2570 7340,2585 v1(7340,2810) ; 7460,1230 7490,1260 7490,2225 ; v1@7490,2405 7490,2225 ; v1(7490,2415) v1(7685,2415) ; v1(7525,3005) 7510,3010 v1(7340,3010) 7310,3010 7280,3040 7280,3135 ; v1(7620,2225) 7490,2225 ; v1(8640,1765) 8680,1725 v1(8710,1725) ; v1(8700,2265) 8700,1970 ; v1(8710,1825) 8710,1865 8700,1875 8700,1970 ; v1(9110,1530) v1(9110,1748.06) 9110,1885 v1(9105,1890) 9105,1920 9090,1935 8915,1935 JP2.1@8880,1970 8700,1970
  Bottom Layer w50: v1(4440,2660) 4528.35,2660 TFTLCD.24@4578.35,2610 ; v1(4960,2690) 5202,2448 5204.88,2448 5233,2419.88 5233,2417 5242,2408 v1@5242,2380 ; v1@5450,2385 5450,1295 5515,1230 7460,1230 ; v1(7400,3340) 7401,3339 7401,3214 7425,3190 7505,3190 7525,3170 v1(7525,3005)
12MI: C43.2 R22.1 U3.26 Y3.1 | length 1027.1
  Top Layer w10: U3.26@5314.33,4340.36 U3.26@5313.5,4339.53 5384.53,4339.53 5432,4387 5548,4387 5680,4255 5948.7,4255 Y3.1@5958.62,4245.08 6107.98,4245.08 C43.2@6108.06,4245 6108.06,4283.06 6120,4295 6165,4295 6172,4302 R22.1@6172,4345
12MO: C46.2 R22.2 U3.27 Y3.2 | length 930.1
  Top Layer w10: U3.27@5313.5,4359.21 5378.76,4359.21 5424.54,4405 5615,4405 5650.08,4440.08 Y3.2@5958.62,4440.08 6103.13,4440.08 C46.2@6108.06,4445 6108.06,4345.06 R22.2@6108,4345
A3: R25.2 U3.62 | length 98.2
  Top Layer w10: R25.2@4779,4200 4780.73,4201.73 U3.62@4876.5,4201.73
A4: R19.1 U3.29 | length 165.4
  Top Layer w10: U3.29@5313.5,4398.58 5353.58,4398.58 5365,4410 5365,4435 5380,4450 R19.1@5443,4450
ADAC0: C38.1 R1.1 | length 70.8
  Top Layer w10: R1.1@5270,3700 5270,3768 C38.1@5272,3770
AVDD12: C136.1 U3.24 | length 139.8
  Top Layer w10: U3.24@5313.5,4300.16 5375.56,4300.16 5400.4,4325 C136.1@5443,4325
AVDD33: C132.1 C133.2 C137.2 FB1.1 U3.2 U3.7 U3.17 | length 1799.6
  Top Layer w10: U3.2@4967.05,4091.5 4967.05,4046.71 4963.4,4043.06 4943.06,4043.06 v1(4930,4030) C132.1@4930,3984 4859,3984 4840,3965 4840,3865 4855,3850 5545,3850 5555,3860 5555,3970 5526.54,3998.46 FB1.1@5480,3998.46 5480,4030 5448,4062 C133.2@5448,4085 5390,4085 5365,4110 5365,4150 5352.64,4162.36 U3.17@5313.5,4162.36 ; U3.7@5065.47,4091.5 5065.47,4030.47 v1(5065,4030) 5090,4005 C137.2@5090,3982
  Bottom Layer w10: v1(4930,4030) v1(5065,4030)
BAUD1: R112.2 U3.56 | length 108
  Top Layer w10: R112.2@4780,4292 4791.64,4292 4819.49,4319.84 U3.56@4876.5,4319.84
BAUD2: R116.1 U3.55 | length 106.2
  Top Layer w10: R116.1@4780,4363 4807,4363 4830.47,4339.53 U3.55@4876.5,4339.53
BOOT0: P2.3 U1.138 | length 722.8
  Top Layer w10: U1.138@6857.32,2921.38 6970.41,2921.38 6981.03,2932 7157,2932 7195,2970 7195,3335
BOOT1: P2.4 TFTLCD.33 U1.48 | length 3446.6
  Top Layer w10: TFTLCD.33@4678.35,3110 4683.35,3115 v1(4955,3115) ; v1(4955,2795) 4955,2790 4987.95,2822.95 U1.48@6022.68,2822.95 6727.05,2822.95 v1(6725,2825) ; v1(7150,2970) 7150,3415 P2.4@7200,3465
  Bottom Layer w10: v1(4955,2795) v1(4955,3115) v1@4960,3120 ; v1(6725,2825) 6728,2822 7077,2822 7150,2895 v1(7150,2970)
BSY: D2.K R21.2 U1.100 U3.40 | length 4528.6
  Top Layer w10: v1(5135,4465) 5120,4465 5104.84,4480.16 U3.40@5104.84,4528.5 5104.84,4570.69 5134.15,4600 5200,4600 5215,4615 R21.2@5215,4633 ; D2.K@5690,3949.96 v1(5870,3950) v1(5870,3950) ; v1(5695,4495) 5695,4490 v1(5870,4490) ; v1(6625,2390) 6626.23,2388.77 6626.23,2278.46 U1.100@6627.01,2277.68
  Bottom Layer w10: v1(5135,4465) 5665,4465 v1(5695,4495) ; v1(5870,4490) v1(5870,3950) 5870,3300 5905,3265 6480,3265 6525,3220 6525,2580 6540,2565 6780,2565 6820,2525 6820,2365 6810,2355 6730,2355 6695,2390 v1(6625,2390)
D0: U3.16 U3.57 | length 569.3
  Top Layer w10: U3.57@4876.5,4300.16 4929.84,4300.16 4940,4290 v1(4945,4290) ; v1(5170,4160) v1(5170,4270) ; v1(5240,4165) 5242.64,4162.36 U3.16@5242.64,4091.5
  Bottom Layer w10: v1(4945,4290) 4965,4290 4993,4262 5162,4262 v1(5170,4270) ; v1(5170,4160) 5175,4165 v1(5240,4165)
D1: U3.21 U3.60 | length 438.8
  Top Layer w10: U3.60@4876.5,4241.1 4877.6,4240 v1(4955,4240) ; v1(5235,4240) 5310.2,4240 5311.3,4241.1 5312.4,4240 U3.21@5313.5,4241.1
  Bottom Layer w10: v1(4955,4240) v1(5235,4240)
D2: U3.49 U3.50 | length 19.7
  Top Layer w10: U3.50@4876.5,4437.95 U3.49@4876.5,4457.64
D3: U3.51 U3.59 | length 279.7
  Top Layer w10: v1(4815,4260) 4815.79,4260.79 U3.59@4876.5,4260.79 ; v1(4815,4415) 4818.27,4418.27 U3.51@4876.5,4418.27
  Bottom Layer w10: v1(4815,4260) v1(4815,4415)
ENUV: R11.1 R14.1 U7.3 | length 381.3
  Top Layer w30: R14.1@8235,3755 8234.94,3754.94 U7.3@8234.94,3650 8234.94,3585.06 8250,3570 R11.1@8440,3570
"F  CS": U1.75 W25Q128.1 | length 3218.6
  Top Layer w10: v1(6100,1790) 6100,2075 6134.88,2109.88 U1.75@6134.88,2277.68 ; v1(7045,1790) v1@7675,1790 ; v1(7675,2330) 8180,2330 8219.68,2369.68 W25Q128.1@8219.68,2405
  Bottom Layer w10: v1(6100,1790) v1(7045,1790) v1@7055,1790 ; v1(7675,1795) v1(7675,2330)
FSMC_A6: TFTLCD.2 U1.50 | length 3669.8
  Top Layer w10: TFTLCD.2@4578.35,1510 4560,1510 4520,1550 4520,3170 4555,3205 v1(4995,3205) ; v1(4995,2760) 4995,2765 5013.58,2783.58 U1.50@6022.68,2783.58
  Bottom Layer w10: v1(4995,2760) v1(4995,3205)
FSMC_D0: TFTLCD.6 U1.85 | length 2418.5
  Top Layer w10: TFTLCD.6@4578.35,1710 4623.35,1665 4745,1665 4780,1630 6305,1630 6331.73,1656.73 U1.85@6331.73,2277.68
FSMC_D1: TFTLCD.7 U1.86 | length 2531.8
  Top Layer w10: v1(4750,1595) 6305,1595 6351.42,1641.42 U1.86@6351.42,2277.68
  Bottom Layer w10: TFTLCD.7@4678.35,1810 4730,1810 4750,1790 v1(4750,1595)
FSMC_D2: TFTLCD.8 U1.114 | length 3223.1
  Top Layer w10: TFTLCD.8@4578.35,1810 4628.35,1760 4780,1760 4825,1805 v1(6000,1805) ; U1.114@6857.32,2448.94 6991.06,2448.94 7005,2435 v1(7005,2410)
  Bottom Layer w10: v1(6000,1805) 6020,1825 6980,1825 7005,1850 v1(7005,2410)
FSMC_D3: TFTLCD.9 U1.115 | length 3327.3
  Top Layer w10: TFTLCD.9@4678.35,1910 4738.35,1850 v1(4980,1850) ; v1(4980,2010) 4985,2010 5000,2025 v1(5800,2025) ; U1.115@6857.32,2468.62 7041.38,2468.62 7055,2455 v1(7055,2410) ; v1(6965,1940) 6965,2005 6985,2025 v1(7050,2025)
  Bottom Layer w10: v1(4980,1850) v1(4980,2010) ; v1(5800,2025) 6220,2025 6330,1915 6940,1915 v1(6965,1940) ; v1(7050,2025) 7055,2030 v1(7055,2410)
FSMC_D4: TFTLCD.10 U1.58 | length 3550.4
  Top Layer w10: v1(4485,1910) 4480,1915 4480,3205 4515,3240 v1(5035,3240) ; v1(5035,2730) 5035,2645 5053.9,2626.1 U1.58@6022.68,2626.1
  Bottom Layer w10: v1(4485,1910) TFTLCD.10@4578.35,1910 ; v1(5035,2730) v1(5035,3240)
FSMC_D5: TFTLCD.11 U1.59 | length 1939.9
  Top Layer w10: TFTLCD.11@4678.35,2010 v1(4930,2010) ; v1(4930,2605) 4931.42,2606.42 U1.59@6022.68,2606.42
  Bottom Layer w10: v1(4930,2010) v1(4930,2605)
FSMC_D6: TFTLCD.12 U1.60 | length 1989.2
  Top Layer w10: TFTLCD.12@4578.35,2010 4628.35,2060 v1(4980,2060) ; v1(4978.37,2578.37) 4986.73,2586.73 U1.60@6022.68,2586.73
  Bottom Layer w10: v1(4978.37,2578.37) 4978.37,2061.63 v1(4980,2060)
FSMC_D7: TFTLCD.13 U1.63 | length 1762.2
  Top Layer w10: TFTLCD.13@4678.35,2110 v1(5015,2110) ; v1(5020.35,2530) 5022.68,2527.68 U1.63@6022.68,2527.68
  Bottom Layer w10: v1(5015,2110) 5015,2524.65 v1(5020.35,2530)
FSMC_D8: TFTLCD.14 U1.64 | length 1796.6
  Top Layer w10: TFTLCD.14@4578.35,2110 4628.35,2160 v1(5055,2160) ; v1(5065,2490) 5082.99,2507.99 U1.64@6022.68,2507.99
  Bottom Layer w10: v1(5055,2160) 5065,2170 v1(5065,2490)
FSMC_D9: TFTLCD.15 U1.65 | length 1620.2
  Top Layer w10: TFTLCD.15@4678.35,2210 4688.35,2200 v1(5105,2200) ; v1(5105,2460) 5133.31,2488.31 U1.65@6022.68,2488.31
  Bottom Layer w10: v1(5105,2200) v1(5105,2460)
FSMC_D10: TFTLCD.16 U1.66 | length 1648.1
  Top Layer w10: TFTLCD.16@4578.35,2210 4628.35,2260 v1(5145,2260) ; v1(5145,2425) 5188.62,2468.62 U1.66@6022.68,2468.62
  Bottom Layer w10: v1(5145,2260) v1(5145,2425)
FSMC_D11: TFTLCD.17 U1.67 | length 1477.5
  Top Layer w10: TFTLCD.17@4678.35,2310 4683.35,2305 v1(5185,2305) ; v1(5185,2400) 5185,2410 5223.94,2448.94 U1.67@6022.68,2448.94
  Bottom Layer w10: v1@5185,2295 v1(5185,2305) v1(5185,2400)
FSMC_D12: TFTLCD.18 U1.68 | length 1517.2
  Top Layer w10: TFTLCD.18@4578.35,2310 4623.35,2355 5215,2355 5215,2395 5249.25,2429.25 U1.68@6022.68,2429.25
FSMC_D13: TFTLCD.19 U1.77 | length 2246.1
  Top Layer w10: TFTLCD.19@4678.35,2410 v1(4885,2410) ; v1@4880,1970 v1(4885,1970) v1(5800,1970) ; v1(6170,1970) 6174.25,1974.25 U1.77@6174.25,2277.68
  Bottom Layer w10: v1(4885,1970) v1(4885,2410) ; v1(5800,1970) v1(6170,1970)
FSMC_D14: TFTLCD.20 U1.78 | length 2533.8
  Top Layer w10: TFTLCD.20@4578.35,2410 4580,2410 4625,2455 v1(4850,2455) ; v1(4850,1920) v1(5800,1920) ; U1.78@6193.94,2277.68 6193.94,2016.06 6205,2005 v1(6205,1935)
  Bottom Layer w10: v1(4850,1920) v1(4850,2455) ; v1(5800,1920) 5815,1935 v1(6205,1935)
FSMC_D15: TFTLCD.21 U1.79 | length 2569.8
  Top Layer w10: TFTLCD.21@4678.35,2510 4795,2510 v1(4805,2500) ; v1(4805,1890) 4815,1890 4825,1880 v1(5800,1880) ; U1.79@6213.62,2277.68 6213.62,2031.38 6235,2010 v1(6235,1900)
  Bottom Layer w10: v1(4805,1890) v1(4805,2500) ; v1(5800,1880) 6215,1880 v1(6235,1900)